# EAGLE board SUNBoardSingleLayer (EAGLE 6.5.0)
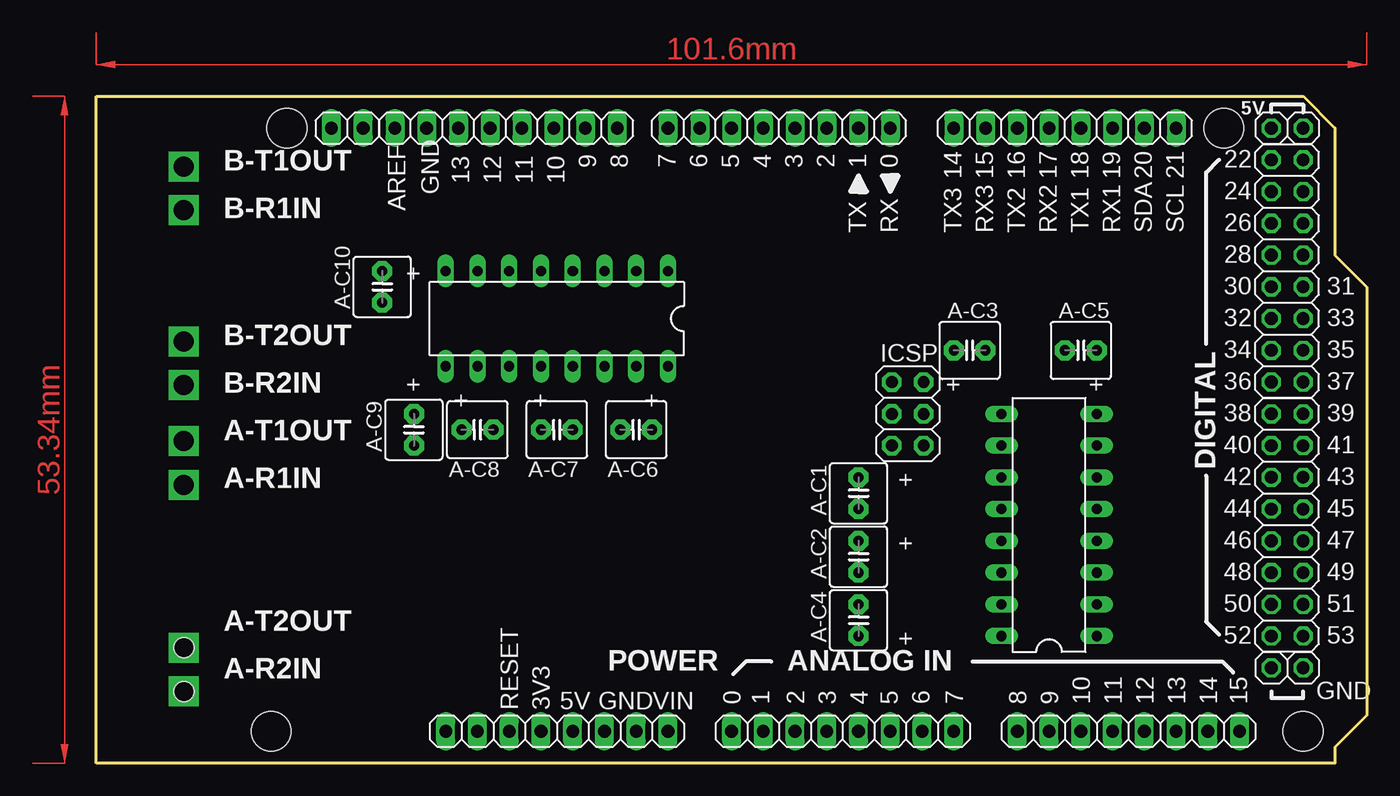
[diagram p0: board, top side]
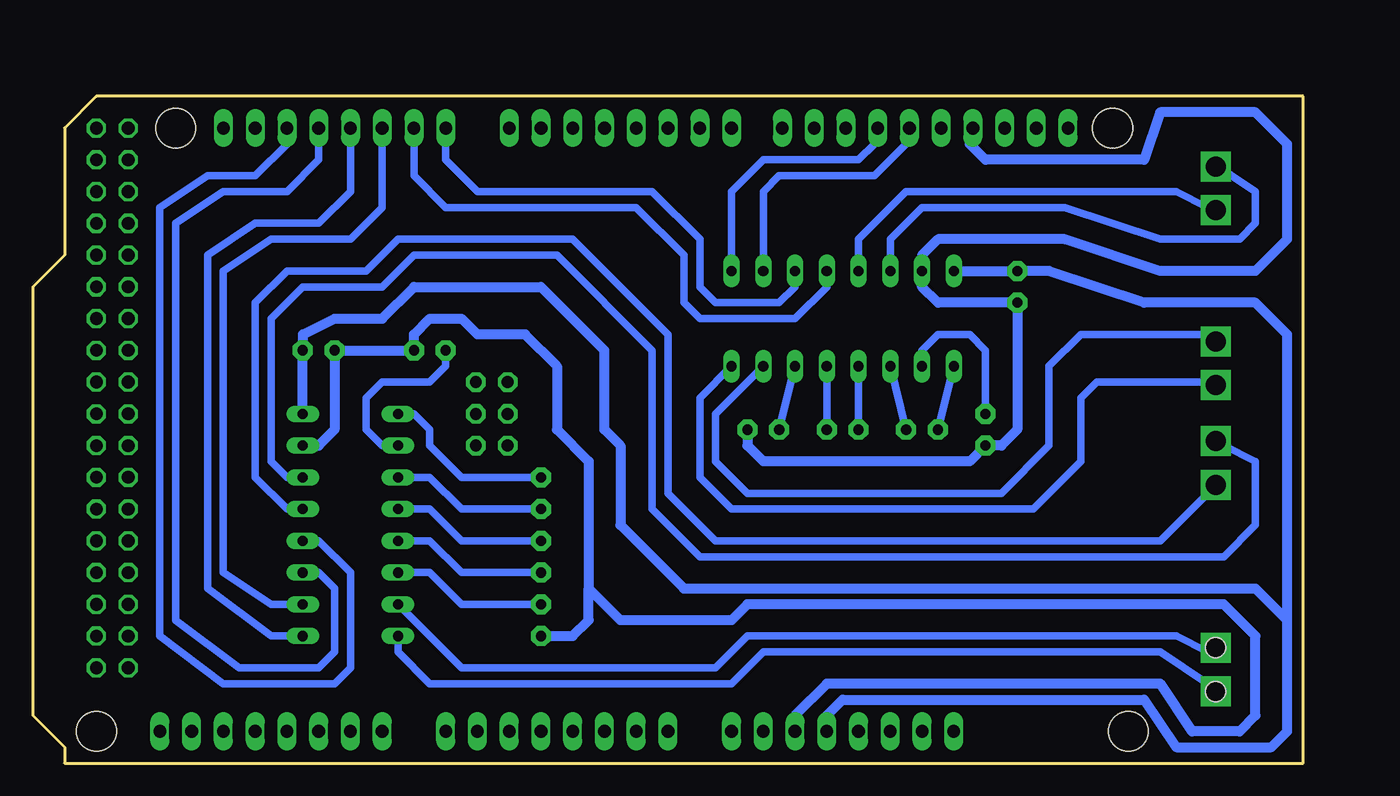
[diagram p1: board, bottom side, seen from below]

Size 101.6 x 53.34 mm. Coordinates in mm from the lower left corner, seen from the top.
Outline: 0,53.34 96.52,53.34 99.06,50.8 99.06,40.64 101.6,38.1 101.6,3.81 99.06,1.27 99.06,0 0,0 0,53.34
Copper layers (1*16): Top 0.035mm / dielectric 1.5mm / Bottom 0.035mm
Design rules "default": minimum track width 10mil, minimum drill 24mil, track to track 8mil, track to pad 8mil, pad to pad 8mil, via to via 8mil, smd to smd 8mil, copper to edge 40mil, drill to drill 8mil, minimum pad ring 10mil, minimum via ring 8mil, stop-mask expansion 4mil, vias tented up to drill 0mil, thermal gap 10mil
Net classes: 0 default: width 0.203 mm, drill 0.406 mm, clearance 0.203 mm; 2 gnd: width 0.305 mm, drill 0.406 mm, clearance 0.203 mm; 3 power usb: width 0.508 mm, drill 0.406 mm, clearance 0.203 mm
Holes 3.2 mm at 96.52,2.54 15.24,50.8 90.17,50.8 13.97,2.54
Holes 1.6 mm at 7,5.73 7,9.23

## Footprints (pad centres in the part's own frame; a part is rotated, then mirrored left to right if it is on the bottom)
C2.5-5 = drill 0.813 pad 1.6 octagon: 1 -1.27,0; 2 1.27,0
1X08 = drill 1.016 long: 1 -8.89,0; 2 -6.35,0; 3 -3.81,0; 4 -1.27,0; 5 1.27,0; 6 3.81,0; 7 6.35,0; 8 8.89,0
2X03 = drill 0.95 pad 1.55 octagon: 1 -2.54,-1.27; 2 -2.54,1.27; 3 0,-1.27; 4 0,1.27; 5 2.54,-1.27; 6 2.54,1.27
1X02 = drill 1.016 long: 1 -1.27,0; 2 1.27,0
1X01 = drill 1.016 octagon: 1 0,0
1X06 = drill 1.016 long: 1 -6.35,0; 2 -3.81,0; 3 -1.27,0; 4 1.27,0; 5 3.81,0; 6 6.35,0
DIL16 = drill 0.813 long: 1 -8.89,-3.81; 2 -6.35,-3.81; 3 -3.81,-3.81; 4 -1.27,-3.81; 5 1.27,-3.81; 6 3.81,-3.81; 7 6.35,-3.81; 8 8.89,-3.81; 9 8.89,3.81; 10 6.35,3.81; 11 3.81,3.81; 12 1.27,3.81; 13 -1.27,3.81; 14 -3.81,3.81; 15 -6.35,3.81; 16 -8.89,3.81
2X08 = drill 1.016 octagon: 1 -8.89,-1.27; 2 -8.89,1.27; 3 -6.35,-1.27; 4 -6.35,1.27; 5 -3.81,-1.27; 6 -3.81,1.27; 7 -1.27,-1.27; 8 -1.27,1.27; 9 1.27,-1.27; 10 1.27,1.27; 11 3.81,-1.27; 12 3.81,1.27; 13 6.35,-1.27; 14 6.35,1.27; 15 8.89,-1.27; 16 8.89,1.27

## Placement (x,y rotation side)
A-C1  [C2.5-5]  60.96,21.59 90 top
A-C2  [C2.5-5]  60.96,16.51 90 top
A-C3  [C2.5-5]  69.85,33.02 0 top
A-C4  [C2.5-5]  60.96,11.43 90 top
A-C5  [C2.5-5]  78.74,33.02 0 top
A-C6  [C2.5-5]  43.18,26.67 180 top
A-C7  [C2.5-5]  36.83,26.67 180 top
A-C8  [C2.5-5]  30.48,26.67 180 top
A-C9  [C2.5-5]  25.4,26.67 90 top
A-C10  [C2.5-5]  22.86,38.1 90 top
ADCH  [1X08]  82.55,2.54 0 top
ADCL  [1X08]  59.69,2.54 0 top
COMMUNICATION  [1X08]  77.47,50.8 180 top
ICSP  3x2M  [2X03]  64.9,27.94 270 top
IOREF  [1X02]  29.21,2.54 0 top
JP1  [1X01]  93.98,50.8 0 top
JP2  [1X01]  96.52,50.8 0 top
JP3  [1X01]  93.98,7.62 0 top
JP4  [1X01]  96.52,7.62 0 top
POWER  [1X06]  39.37,2.54 0 top
PWMH  [1X08]  32.77,50.8 180 top
PWML  [1X08]  54.61,50.8 180 top
RS232-TO-TTL_B  [DIL16]  36.83,35.56 180 top
RS232-TO_TTL_A  [DIL16]  76.2,19.05 90 top
SCL_SOA  [1X02]  20.07,50.8 0 top
XIOH  [2X08]  95.25,39.37 90 top
XIOL  [2X08]  95.25,19.05 90 top

## Library data of the parts
A-C1-A-C10 = capacitor-wima
ADCH ADCL COMMUNICATION IOREF JP1-JP4 POWER PWMH PWML SCL_SOA XIOH XIOL = pinhead
ICSP = SmartPrj
RS232-TO-TTL_B RS232-TO_TTL_A = maxim

## Nets
+5V [power usb]: ICSP.2
GND [gnd]: ICSP.6
PB1: ICSP.3
PB2: ICSP.4
PB3: ICSP.1
RESET: ICSP.5
S$1: A-C5.2 RS232-TO_TTL_A.8
S$2: COMMUNICATION.7 RS232-TO-TTL_B.4
S$3: COMMUNICATION.4 RS232-TO_TTL_A.3
S$4: POWER.3
S$5: A-C4.2 RS232-TO_TTL_A.14
S$6: A-C2.2 RS232-TO_TTL_A.12
S$7: A-C2.1 RS232-TO_TTL_A.13
S$8: A-C1.2 RS232-TO_TTL_A.9
S$9: A-C1.1 RS232-TO_TTL_A.11
S$11: A-C3.1 RS232-TO_TTL_A.10
S$12: RS232-TO_TTL_A.5
S$13: RS232-TO_TTL_A.16
S$14: COMMUNICATION.5 RS232-TO_TTL_A.1
S$15: A-C6.1 A-C9.1 A-C10.1 RS232-TO-TTL_B.7
S$16: A-C9.2 RS232-TO-TTL_B.10
S$17: RS232-TO_TTL_A.6
S$18: RS232-TO-TTL_B.15
S$19: RS232-TO-TTL_B.16
S$20: RS232-TO-TTL_B.6
S$21: RS232-TO-TTL_B.5
S$22: A-C10.2 RS232-TO-TTL_B.8
S$23: RS232-TO-TTL_B.1
S$24: A-C3.2 A-C4.1 A-C5.1 POWER.4 RS232-TO_TTL_A.7
S$26: RS232-TO-TTL_B.2
S$27: A-C8.2 RS232-TO-TTL_B.9
S$28: COMMUNICATION.6 RS232-TO_TTL_A.2
S$29: A-C8.1 RS232-TO-TTL_B.11
S$30: A-C7.2 RS232-TO-TTL_B.12
S$36: A-C7.1 RS232-TO-TTL_B.13
S$37: A-C6.2 RS232-TO-TTL_B.14
S$41: COMMUNICATION.8 RS232-TO-TTL_B.3
S$44: RS232-TO_TTL_A.15
S$45: COMMUNICATION.3 RS232-TO_TTL_A.4

## Tracks (layer width: path | path; a pad name or v marks a point on that pad's centre or on a via)
S$1
  Bottom 0.813: 3.81,13.97 49.53,13.97 54.61,19.05 54.61,25.4 55.88,26.67 55.88,33.02 60.96,38.1 71.12,38.1 73.66,35.56 77.47,35.56 80.01,34.29 A-C5.2 RS232-TO_TTL_A.8
S$2
  Bottom 0.61: RS232-TO-TTL_B.4 38.1,38.1 40.64,35.56 48.26,35.56 49.53,36.83 49.53,40.64 53.34,44.45 68.58,44.45 71.12,46.99 COMMUNICATION.7
S$3
  Bottom 0.61: RS232-TO_TTL_A.3 78.74,15.24 77.47,13.97 77.47,8.89 78.74,7.62 85.09,7.62 90.17,11.43 90.17,43.18 86.36,45.72 81.28,45.72 78.74,48.26 COMMUNICATION.4
S$4
  Bottom 0.813: 1.27,11.43 1.27,2.54 2.54,1.27 10.16,1.27 12.7,5.08 36.83,5.08 38.1,3.81 POWER.3 | 1.27,11.43 1.27,34.29 3.81,36.83 12.7,36.83 20.32,39.37 | 1.27,11.43 3.81,13.97
S$5
  Bottom 0.61: A-C4.2 67.31,12.7 69.85,15.24 RS232-TO_TTL_A.14
S$6
  Bottom 0.61: A-C2.2 67.31,17.78 69.85,20.32 RS232-TO_TTL_A.12
S$7
  Bottom 0.61: A-C2.1 67.31,15.24 69.85,17.78 RS232-TO_TTL_A.13
S$8
  Bottom 0.61: A-C1.2 67.31,22.86 69.85,25.4 69.85,26.67 71.12,27.94 RS232-TO_TTL_A.9
S$9
  Bottom 0.61: A-C1.1 67.31,20.32 69.85,22.86 RS232-TO_TTL_A.11
S$11
  Bottom 0.61: A-C3.1 68.58,31.75 69.85,30.48 73.66,30.48 74.93,29.21 74.93,26.67 73.66,25.4 RS232-TO_TTL_A.10
S$12
  Bottom 0.61: 6.35,22.86 11.43,17.78 46.99,17.78 50.8,21.59 50.8,34.29 58.42,41.91 72.39,41.91 74.93,39.37 81.28,39.37 83.82,36.83 83.82,22.86 81.28,20.32 RS232-TO_TTL_A.5
S$13
  Bottom 0.61: RS232-TO_TTL_A.16 72.39,8.89 69.85,6.35 45.72,6.35 43.18,8.89 11.43,8.89 7.62,6.35
S$14
  Bottom 0.61: RS232-TO_TTL_A.1 82.55,10.16 87.63,13.97 87.63,40.64 83.82,43.18 78.74,43.18 76.2,45.72 COMMUNICATION.5
S$15
  Bottom 0.813: 26.67,50.8 26.67,49.53 25.4,48.26 12.7,48.26 11.43,52.07 3.81,52.07 1.27,49.53 1.27,41.91 3.81,39.37 11.43,39.37 19.05,41.91 29.21,41.91 30.48,40.64 RS232-TO-TTL_B.7 30.48,38.1 29.21,36.83 A-C10.1 22.86,26.67 24.13,25.4 A-C9.1 26.67,24.13 43.18,24.13 44.45,25.4 A-C6.1
S$16
  Bottom 0.61: A-C9.2 25.4,33.02 26.67,34.29 29.21,34.29 30.48,33.02 RS232-TO-TTL_B.10
S$17
  Bottom 0.61: 6.35,25.4 3.81,24.13 3.81,19.05 6.35,16.51 48.26,16.51 52.07,20.32 52.07,33.02 59.69,40.64 71.12,40.64 73.66,38.1 80.01,38.1 82.55,35.56 82.55,24.13 81.28,22.86 RS232-TO_TTL_A.6
S$18
  Bottom 0.61: RS232-TO-TTL_B.15 46.99,27.94 46.99,24.13 44.45,21.59 24.13,21.59 20.32,25.4 20.32,31.75 17.78,34.29 7.62,34.29
S$19
  Bottom 0.61: RS232-TO-TTL_B.16 48.26,29.21 48.26,22.86 45.72,20.32 21.59,20.32 17.78,24.13 17.78,29.21 16.51,30.48 7.62,30.48
S$20
  Bottom 0.61: RS232-TO-TTL_B.6 33.02,41.91 30.48,44.45 19.05,44.45 11.43,41.91 5.08,41.91 3.81,43.18 3.81,45.72 7.62,48.26
S$21
  Bottom 0.61: RS232-TO-TTL_B.5 35.56,41.91 31.75,45.72 10.16,45.72 7.62,44.45
S$22
  Bottom 0.813: RS232-TO-TTL_B.8 A-C10.2 20.32,39.37
S$23
  Bottom 0.61: 34.29,50.8 34.29,49.53 35.56,48.26 43.18,48.26 45.72,45.72 RS232-TO-TTL_B.1
S$24
  Bottom 0.813: A-C4.1 58.42,10.16 57.15,11.43 57.15,13.97 | RS232-TO_TTL_A.7 78.74,25.4 77.47,26.67 A-C5.1 A-C3.2 71.12,34.29 69.85,35.56 67.31,35.56 66.04,34.29 62.23,34.29 59.69,31.75 59.69,26.67 57.15,24.13 57.15,13.97 | POWER.4 40.64,3.81 38.1,6.35 11.43,6.35 8.89,2.54 5.08,2.54 3.81,3.81 3.81,10.16 6.35,12.7 44.45,12.7 45.72,11.43 54.61,11.43 57.15,13.97
S$25  (via drill 1.6)
  other vias: 7,9.23
S$26
  Bottom 0.61: 31.75,50.8 31.75,49.53 34.29,46.99 41.91,46.99 43.18,45.72 RS232-TO-TTL_B.2
S$27
  Bottom 0.61: RS232-TO-TTL_B.9 A-C8.2
S$28
  Bottom 0.61: RS232-TO_TTL_A.2 82.55,12.7 86.36,15.24 86.36,39.37 82.55,41.91 76.2,41.91 73.66,44.45 COMMUNICATION.6
S$29
  Bottom 0.61: A-C8.1 RS232-TO-TTL_B.11
S$30
  Bottom 0.61: RS232-TO-TTL_B.12 A-C7.2
S$31  (via drill 1.6)
  other vias: 7,5.73
S$32  (via drill 1.6)
  other vias: 7,22.27
S$34  (via drill 1.6)
  other vias: 7,25.77
S$35  (via drill 1.6)
  other vias: 7,30.23
S$36
  Bottom 0.61: RS232-TO-TTL_B.13 A-C7.1
S$37
  Bottom 0.61: RS232-TO-TTL_B.14 A-C6.2
S$38  (via drill 1.6)
  other vias: 7,47.73
S$39  (via drill 1.6)
  other vias: 7,44.23
S$40  (via drill 1.6)
  other vias: 7,33.73
S$41
  Bottom 0.61: RS232-TO-TTL_B.3 40.64,38.1 41.91,36.83 46.99,36.83 48.26,38.1 48.26,41.91 52.07,45.72 66.04,45.72 68.58,48.26 COMMUNICATION.8
S$44
  Bottom 0.61: 7.62,8.89 10.16,10.16 44.45,10.16 46.99,7.62 67.31,7.62 RS232-TO_TTL_A.15
S$45
  Bottom 0.61: COMMUNICATION.3 81.28,49.53 83.82,46.99 87.63,46.99 91.44,44.45 91.44,10.16 86.36,6.35 77.47,6.35 76.2,7.62 76.2,15.24 78.74,17.78 RS232-TO_TTL_A.4
(copper drawn outside any net)
  shapes: Top area x2

## Text on the board
tPlace: 9 | 8 | 7 | 6 | 5 | 4 | 3 | 2 | 1 | 0 | 22 | B-T1OUT | 14 | 15 | 16 | 17 | 18 | 19 | 20 | 21 | 13 | 12 | 11 | 10 | 24 | B-R1IN | 26 | 28 | 30 | 31 | 32 | 33 | B-T2OUT | 34 | 35 | B-R2IN | 36 | 37 | 38 | 39 | A-T1OUT | 40 | 41 | A-R1IN | 42 | 43 | 44 | 45 | 46 | 47 | 48 | 49 | 50 | 51 | A-T2OUT | 52 | 53 | A-R2IN | 0 | 1 | 2 | 3 | 4 | 5 | 6 | 7 | 8 | 9 | 10 | 11 | 12 | 13 | 14 | 15
tNames: 5V | GND | AREF | TX | RX | TX3 | RX3 | TX2 | RX2 | TX1 | RX1 | SDA | SCL | + | + | + | + | + | + | + | DIGITAL | + | + | + | ANALOG IN | GND | RESET | 3V3 | 5V | GND | VIN